# Altium PCB PCB.PcbDoc (part 2 of 2)
Units mil, origin at the board's own origin, x right, y up, seen from the top; angles counter-clockwise.
Board outline 3500 x 2500 mil, 4 copper layers (Layer 1, Layer 2, Layer 3, Layer 4), stack 23.756 mil thick; 83 components, 64 nets, 341 pads, 402 vias.
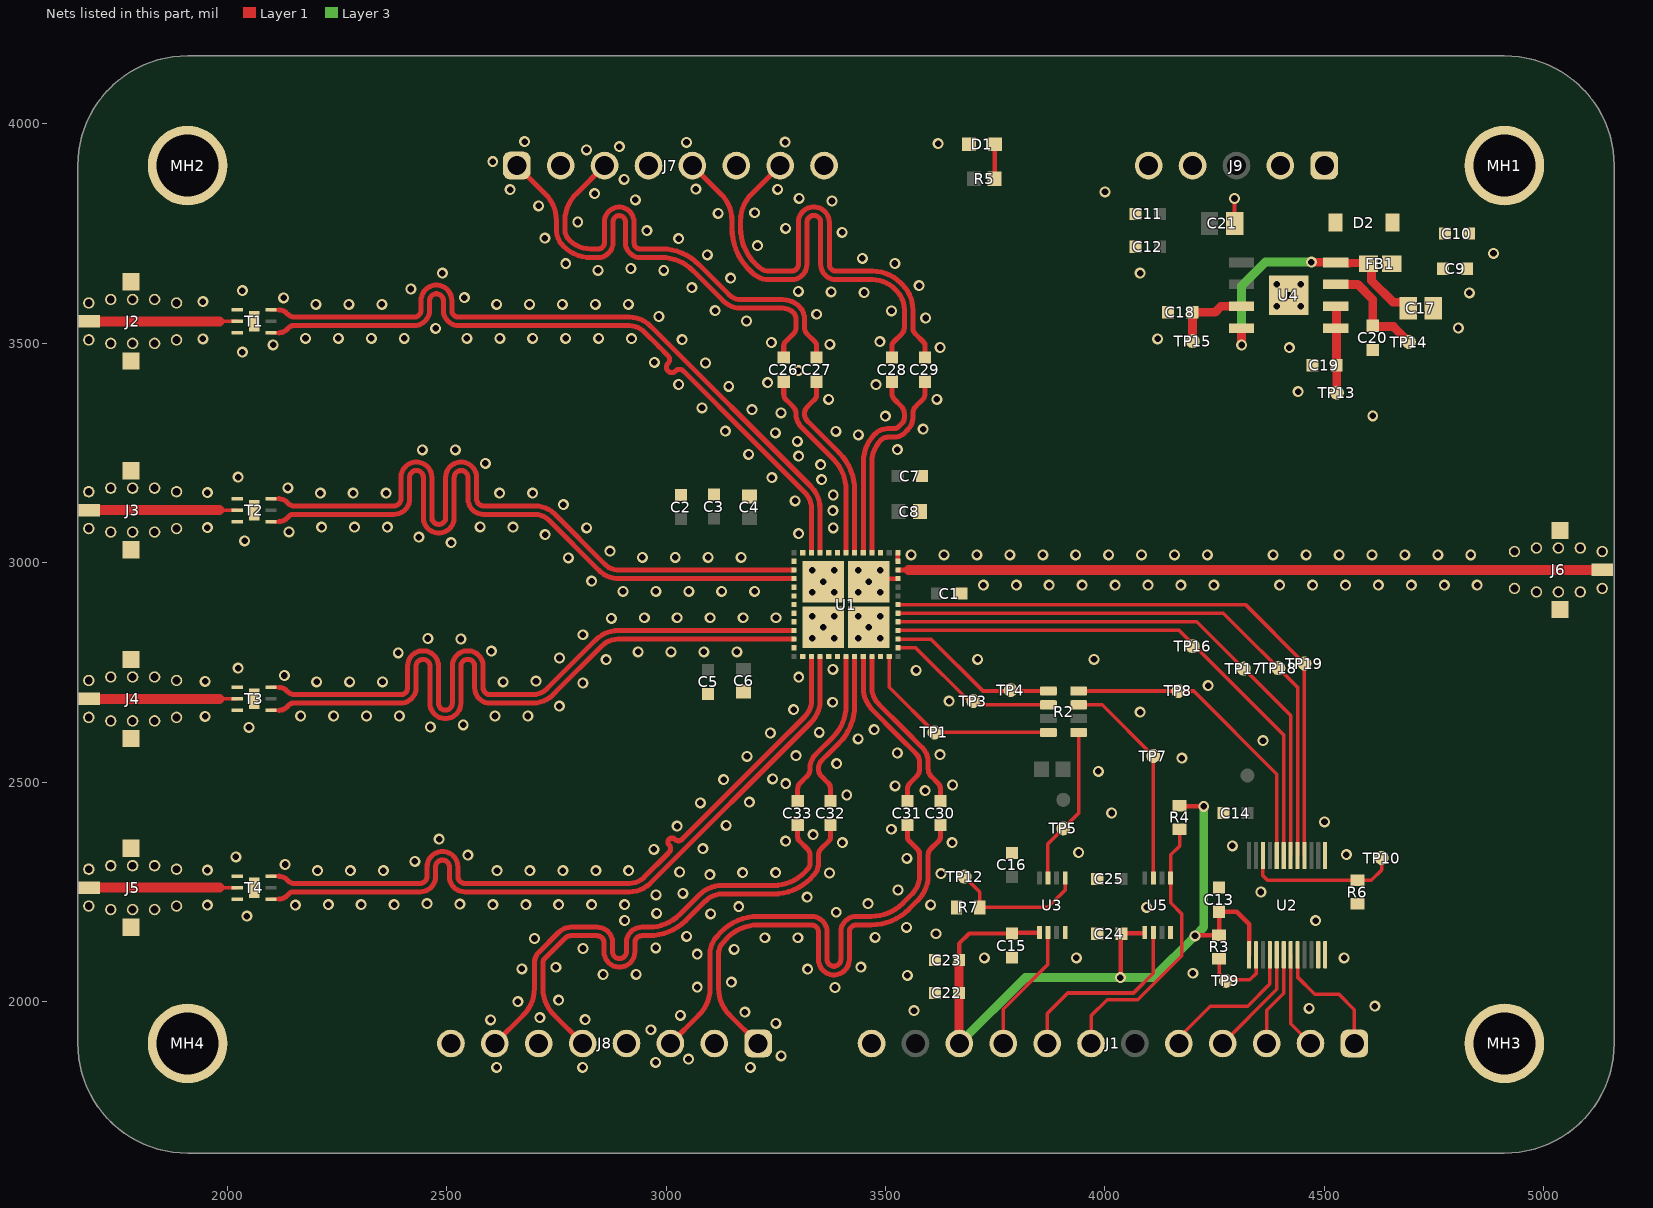
[diagram p4: the nets of this part, all layers, seen from the top]

## Via types
v1: diameter 25, hole 15, Layer 1 to Layer 4, tented both sides, 402 vias

## Nets (pads, with @x,y where several pads share a name; then routed paths per layer and width w, separated by ;. In a path a pad name is that pad's centre, name@x,y a point inside that pad or via, vN(x,y) a via of type N, cw(c..) or ccw(c..) an arc to the next point about the centre after c; other vN are vias at no path point) (continued)
GND: C1.1 C2.1 C3.2 C4.2 C5.2 C6.2 C7.2 C8.2 C9.1 C10.2 C11.1 C12.2 C13.2 C14.2 C15.2 C16.2 C17.2 C18.2 C19.2 C20.2 C21.2 C22.1 C23.2 C24.2 C25.2 D1.1 J1.12 J2.2 J3.2 J4.2 J5.2 J6.2 J7.2 J7.4 J7.6 J7.8 J8.2 J8.4 J8.6 J8.8 J9.4 J9.5 MH1.1 MH2.1 MH3.1 MH4.1 R6.1 R7.1 T1.1 T1.3 T1.7 T2.1 T2.3 T2.7 T3.1 T3.3 T3.7 T4.1 T4.3 T4.7 U1.2 U1.5 U1.6 U1.7 U1.8 U1.9 U1.12 U1.14 U1.17 U1.18 U1.23 U1.34 U1.36 U1.37 U1.39 U1.44 U1.45 U1.48 U1.49 U1.50 U1.51 U1.52 U2.11 U2.12 U2.13 U3.4 U4.EP U5.4 | length 145.5
  Layer 1 w10: v1(3462.17,2957.17) 3469.06,2964.06 U1.34@3528.11,2964.06 ; U1.36@3528.11,3003.43 U1.37@3528.11,3023.11 ; v1(4295,3830) 4295,3773.38 C21.2@4295.3,3773.08
  other v1: 2613.92,1850.61 2809.99,1850.68 3191.97,1850.7 2976.5,1862.09 3051.16,1869.22 3262.3,1876.74 2965.37,1936.26 3250.25,1950.77 2600.43,1958.65 2815.71,1959.15 2712.47,1963.65 3032.82,1969.04 3179.78,1976.43 3565,1980 4465,1985 4615,1990 2662.66,2000.51 2755.53,2003.91 3384.99,2032.6 3071.13,2033.52 3148.87,2044.77 3550,2060 2856.71,2062.12 2931.71,2062.54 4200,2065 3322.62,2074.25 2671.4,2075 2749.14,2078.64 3443.92,2078.99 3725,2100 3935,2100 4545,2100 3071.13,2108.52 3155.09,2119.51 2810.76,2121.4 2976.58,2122.63 2700.42,2144.16 3225.31,2145.86 3300.31,2145.86 3476.41,2146.58 3046.85,2148.84 3615,2155 3547.75,2169.72 2905.53,2185.13 4480,2185 2045,2195 3101.46,2200.25 2978.75,2201.35 3387.76,2203.95 4095,2215 3165.7,2216.77 1955,2220 2155.6,2220.1 2230.59,2221.13 2305.59,2221.13 2380.59,2221.13 2605.53,2221.13 2680.53,2221.13 2755.53,2221.13 2830.53,2221.13 2905.53,2221.13 3602.73,2220.74 2530.55,2222.51 2455.55,2223.55 3460.14,2223.6 3321.52,2238.4 2977.16,2243.35 3038.26,2247 4355,2250 3528.42,2254.63 3099.83,2289.83 3626.35,2291.92 3372.48,2293.43 3174.71,2294.14 3249.71,2294.3 3030.84,2295.73 2206,2298.87 2281,2298.87 2356,2298.87 2614.97,2298.87 2689.97,2298.87 2764.97,2298.87 2839.97,2298.87 2914.97,2298.87 1955,2300 2132.28,2312.66 2427.99,2319.9 3548.61,2326.87 2020,2330 2548.73,2334.05 4550,2335 3940,2340 2972.34,2347.18 3083.88,2348.77 4290,2355 3401.64,2362.53 3651.64,2362.53 3272.38,2365.8 2483.25,2370.62 3335.18,2380.89 3513.28,2393.03 3025.37,2400.21 3136.91,2401.8 4500,2410 4015,2430 3078.4,2453.25 3189.94,2454.83 3411.68,2470.98 3590.47,2480.85 3521.8,2492 3652.8,2493.81 3272.75,2496.79 3131.44,2506.28 3242.97,2507.87 3985,2525 3388.53,2542.32 4175,2555 3184.47,2559.31 3296.01,2560.9 3624.22,2563.15 3526.96,2566.82 4360,2595 3437.78,2598.88 3237.5,2612.35 3349.04,2613.93 3473.93,2619.86 2050,2625 2463.24,2625.89 2538.07,2630.89 1950,2650 2167.61,2651.13 2242.61,2651.13 2317.61,2651.13 2392.61,2651.13 2610.29,2651.13 2685.29,2651.13 4080,2660 3290.54,2665.38 2756.82,2673.7 3379.7,2682.38 3645,2685 4235,2720 2810.4,2726.18 2204.08,2728.87 2279.08,2728.87 2354.08,2728.87 2628.79,2728.87 1950,2730 2703.77,2730.61 3302.34,2739.44 2130.47,2743.25 3570,2755 3380.09,2757.38 2025,2760 2863.43,2779.21 3710,2780 3975,2780 2757.35,2783.08 2389.96,2794.73 2936.26,2797.12 3011.26,2797.12 3086.26,2797.12 3161.26,2797.12 2602.23,2799.01 2532.42,2826.43 2457.43,2827.5 3333.5,2828.5 3383.5,2828.5 3437.83,2828.5 3487.83,2828.5 2810.38,2836.12 3357.83,2852.83 3462.17,2852.83 2875.48,2873.36 2950.47,2874.86 3025.47,2874.86 3100.47,2874.86 3175.47,2874.86 3250.47,2874.86 3333.5,2878.5 3383.5,2878.5 3437.83,2878.5 3487.83,2878.5 3333.5,2932.83 3383.5,2932.83 3437.83,2932.83 3487.83,2932.83 2901.9,2934.91 2976.9,2934.91 3051.9,2934.91 3126.9,2934.91 3201.9,2934.91 3722.94,2949.31 3797.94,2949.31 3872.94,2949.31 3947.94,2949.31 4022.94,2949.31 4097.94,2949.31 4172.94,2949.31 4247.94,2949.31 4397.94,2949.31 4472.94,2949.31 4547.94,2949.31 4622.94,2949.31 4697.94,2949.31 4772.94,2949.31 4847.94,2949.31 3357.83,2957.17 2830.7,2958.46 3333.5,2982.83 3383.5,2982.83 3437.83,2982.83 3487.83,2982.83 2777.48,3011.31 2946.02,3012.66 3021.02,3012.66 3096.02,3012.66 3171.02,3012.66 3558.27,3018.17 3633.27,3018.17 3708.27,3018.17 3783.27,3018.17 3858.27,3018.17 3933.27,3018.17 4008.27,3018.17 4083.27,3018.17 4158.27,3018.17 4233.27,3018.17 4383.27,3018.17 4458.27,3018.17 4533.27,3018.17 4608.27,3018.17 4683.27,3018.17 4758.27,3018.17 4833.27,3018.17 2872.3,3026.44 2510.68,3045.86 2040,3050 2436.75,3058.47 2724.45,3064.34 3302.23,3066.5 2141.03,3070.37 2819.27,3079.47 1955,3080 3380.97,3079.5 2215.25,3081.13 2290.25,3081.13 2365.25,3081.13 2651.35,3081.13 2576.35,3082.07 3379.98,3119.08 2766.1,3132.37 3294.1,3141.06 3380.97,3154.5 2212.42,3158.87 2287.42,3158.87 2362.42,3158.87 2620.94,3158.87 2695.94,3158.87 1955,3160 2138.36,3170.73 3354.62,3189.66 3241.06,3194.09 2025,3195 3352.41,3223.85 2588.47,3226.48 3302,3243.11 3188.03,3247.13 2445.06,3257.15 2520.06,3257.21 3526.82,3257.97 3299.38,3276.89 3438.15,3291.66 3248.97,3296.14 3386.84,3299.38 3135,3300.16 3585.7,3304.43 3499.86,3334.28 4610,3335 3261.88,3341.84 3195.93,3349.17 3081.96,3353.19 3370.44,3372.56 3617.08,3372.55 4440,3390 3142.9,3402.21 3028.93,3406.23 3478.28,3406.11 3231.5,3410.41 3301.32,3437.81 3089.87,3455.24 2973.51,3456.76 2035,3480 4420,3490 3624.62,3490.58 2105.05,3496.73 3373.2,3497.53 3240.16,3501.98 3487.32,3503.89 3036.84,3508.27 1945,3510 4120,3510 2178.65,3511.13 2253.65,3511.13 2328.65,3511.13 2403.65,3511.13 2546.31,3511.13 2621.31,3511.13 2696.31,3511.13 2771.31,3511.13 2846.31,3511.13 2921.3,3510.61 2474.98,3534.31 4805,3535 3183.27,3550.86 3591.35,3557.8 2983.71,3561.21 3343.28,3566.3 3112.02,3574.29 3513.61,3574.13 4391.19,3584.33 4446.19,3584.33 2202.48,3588.87 2277.48,3588.87 2352.48,3588.87 2614,3588.87 2689,3588.87 2764,3588.87 2839,3588.87 2914,3588.87 1945,3595 2128.96,3603.7 2540.52,3603.92 4418.47,3609.33 4830,3615 3451.28,3615.86 3376.3,3617.27 3301.3,3618.21 2035,3620 2418.83,3623.83 3058.74,3627.07 3576.49,3631.31 4391.19,3634.33 4446.19,3634.33 3147.27,3648.48 2490.66,3659.94 4080,3660 2845.02,3666.4 2994.78,3666.25 2919.91,3670.57 2771.58,3681.59 3521.15,3681.93 3447.06,3693.6 3094.08,3701.36 4885,3705 3208.38,3722.79 3028.95,3738.54 2723.99,3739.56 3401.03,3752.82 2956.15,3756.59 3272.37,3761.9 2798.87,3776.5 3118.7,3796.02 3201.75,3797.49 2709.89,3813.22 3378.18,3824.25 2930.2,3826.96 3303.41,3830.18 2837.19,3840.97 4000,3845 2644.67,3850.25 3067.82,3851.12 3254.49,3850.82 2904.64,3873.76 2605.25,3914.06 2818.83,3940.76 2893.48,3947.92 3620,3955 3046.6,3957.69 3271.22,3958.43 2677.96,3959.3
GPIO_DIR: J1.7 R4.1 U5.5 | length 634
  Layer 1 w8: J1.7@3968.23,1905 3968.23,1968.23 4005,2005 4075,2005 4175,2105 4175,2200 4149.53,2225.47 U5.5@4149.53,2281.89 4149.53,2334.53 4170,2355 R4.1@4170,2393.36
IFOUT1_CAP_N: C27.2 J7.3 | length 1060
  Layer 1 w11.46: J7.3@2860,3905 2794.29,3839.29 ccw(c2853.58,3780) 2769.73,3780 2769.73,3759.79 ccw(c2804.79,3759.79) 2780,3735 ccw(c2828.28,3783.28) 2828.28,3715 2829.94,3715 2845.4,3715 ccw(c2845.4,3729.23) 2859.63,3729.23 2859.63,3776.65 cw(c2893.32,3776.65) 2927.01,3776.65 2927.01,3729.23 ccw(c2941.24,3729.23) 2941.24,3715 2981.1,3715 2990.06,3715 cw(c2990.06,3595.54) 3074.53,3680.01 3144,3610.54 ccw(c3170.75,3637.29) 3170.75,3599.46 3265.86,3599.46 cw(c3265.86,3545.86) 3303.76,3583.76 cw(c3275.59,3555.59) 3315.43,3555.59 3315.43,3535 ccw(c3333.72,3535) 3320.79,3522.07 3339.88,3502.98 cw(c3331.9,3495) 3343.18,3495 C27.2@3343.18,3467.56
IFOUT1_CAP_P: C26.2 J7.1 | length 1060
  Layer 1 w11.46: J7.1@2660,3905 2725.71,3839.29 cw(c2666.42,3780) 2750.27,3780 2750.27,3759.79 ccw(c2804.79,3759.79) 2766.24,3721.24 ccw(c2828.28,3783.28) 2828.28,3695.54 2829.94,3695.54 2845.4,3695.54 ccw(c2845.4,3729.23) 2879.09,3729.23 2879.09,3776.65 cw(c2893.32,3776.65) 2907.55,3776.65 2907.55,3729.23 ccw(c2941.24,3729.23) 2941.24,3695.54 2981.1,3695.54 2990.06,3695.54 cw(c2990.06,3595.54) 3060.77,3666.25 3130.24,3596.78 ccw(c3170.75,3637.29) 3170.75,3580 3265.86,3580 cw(c3265.86,3545.86) 3290,3570 cw(c3275.59,3555.59) 3295.97,3555.59 3295.97,3535 cw(c3277.68,3535) 3290.61,3522.07 3271.53,3502.98 ccw(c3279.5,3495) 3268.22,3495 C26.2@3268.22,3467.56
IFOUT1_N: C27.1 U1.42 | length 440.2
  Layer 1 w11.46: C27.1@3343.18,3412.44 3343.18,3384.3 cw(c3324.89,3384.3) 3337.82,3371.36 3321.77,3355.31 ccw(c3337.09,3340) 3315.43,3340 ccw(c3340.61,3340) 3322.81,3322.19 3394.58,3250.42 cw(c3310.11,3165.95) 3429.57,3165.95 3429.57,3023.22 U1.42@3429.68,3023.11
IFOUT1_P: C26.1 U1.43 | length 440.2
  Layer 1 w11.46: C26.1@3268.22,3412.44 3268.22,3384.3 ccw(c3286.51,3384.3) 3273.58,3371.36 3289.63,3355.31 cw(c3274.32,3340) 3295.97,3340 ccw(c3340.61,3340) 3309.05,3308.43 3380.82,3236.66 cw(c3310.11,3165.95) 3410.11,3165.95 3410.11,3023.22 U1.43@3410,3023.11
IFOUT2_CAP_N: C29.2 J7.7 | length 1047.6
  Layer 1 w11.46: J7.7@3260,3905 3194.29,3839.29 ccw(c3253.58,3780) 3169.73,3780 3169.73,3762.27 ccw(c3284.61,3762.42) 3208.83,3676.08 cw(c3188.42,3652.85) 3210.13,3674.87 ccw(c3235.45,3700.45) 3210.33,3674.68 ccw(c3235.45,3700.45) 3235.45,3664.46 3270.32,3664.46 3285.78,3664.46 ccw(c3285.78,3680.19) 3301.51,3680.19 3301.51,3775.58 cw(c3336.7,3775.58) 3371.89,3775.58 3371.89,3680.19 ccw(c3387.62,3680.19) 3387.62,3664.46 3469.44,3664.46 3470,3664.46 cw(c3470,3572.57) 3534.97,3637.55 3538.76,3633.76 cw(c3482.15,3577.15) 3562.21,3577.15 3562.21,3535 ccw(c3580.5,3535) 3567.57,3522.07 3586.66,3502.98 cw(c3578.68,3495) 3589.96,3495 C29.2@3589.96,3467.56
IFOUT2_CAP_P: C28.2 J7.5 | length 1047.6
  Layer 1 w11.46: J7.5@3060,3905 3125.71,3839.29 cw(c3066.42,3780) 3150.27,3780 3150.27,3762.26 ccw(c3284.61,3762.42) 3195.99,3661.46 cw(c3188.42,3652.85) 3196.46,3661.02 ccw(c3235.45,3700.45) 3196.68,3660.81 ccw(c3210.33,3674.68) 3196.75,3660.74 ccw(c3235.45,3700.45) 3235.45,3645 3270.32,3645 3285.78,3645 ccw(c3285.78,3680.19) 3320.97,3680.19 3320.97,3775.58 cw(c3336.7,3775.58) 3352.43,3775.58 3352.43,3680.19 ccw(c3387.62,3680.19) 3387.62,3645 3469.44,3645 3470,3645 cw(c3470,3572.57) 3521.21,3623.79 3525,3620 cw(c3482.15,3577.15) 3542.75,3577.15 3542.75,3535 cw(c3524.46,3535) 3537.39,3522.07 3518.3,3502.98 ccw(c3526.28,3495) 3515,3495 C28.2@3515,3467.56
IFOUT2_N: C29.1 U1.40 | length 452.6
  Layer 1 w11.46: U1.40@3469.06,3023.11 3468.94,3023.22 3468.94,3229.16 cw(c3540.84,3229.16) 3490,3280 cw(c3505.06,3264.94) 3505.06,3286.24 3519.62,3286.24 ccw(c3519.62,3320.38) 3543.76,3296.24 3551.38,3303.86 ccw(c3525.25,3330) 3562.21,3330 3562.21,3340 cw(c3585.56,3340) 3569.05,3356.51 3584.6,3372.07 ccw(c3571.67,3385) 3589.96,3385 C29.1@3589.96,3412.44
IFOUT2_P: C28.1 U1.41 | length 452.6
  Layer 1 w11.46: U1.41@3449.37,3023.11 3449.48,3023.22 3449.48,3229.16 cw(c3540.84,3229.16) 3476.24,3293.76 cw(c3505.06,3264.94) 3505.06,3305.7 3519.62,3305.7 ccw(c3519.62,3320.38) 3530,3310 3537.62,3317.62 ccw(c3525.25,3330) 3542.75,3330 3542.75,3340 ccw(c3519.4,3340) 3535.92,3356.51 3520.36,3372.07 cw(c3533.29,3385) 3515,3385 C28.1@3515,3412.44
IFOUT3_CAP_N: C30.2 J8.1 | length 1112.3
  Layer 1 w11.46: 3129.41,2134.4 ccw(c3154.79,2110.21) 3119.73,2110.21 3119.73,2030 ccw(c3203.58,2030) 3144.29,1970.71 J8.1@3210,1905 ; 3129.43,2134.42 cw(c3154.79,2110.21) 3129.77,2134.76 ccw(c3107.62,2156.34) 3131.92,2137.22 cw(c3209.47,2076.51) 3209.47,2175 3217.35,2175 3331.57,2175 cw(c3331.57,2159.27) 3347.3,2159.27 3347.3,2096.58 ccw(c3382.49,2096.58) 3417.68,2096.58 3417.68,2159.27 cw(c3433.41,2159.27) 3433.41,2175 3448.87,2175 3467.37,2175 ; 3467.39,2175 ccw(c3467.27,2296.3) 3553.05,2210.53 3573.76,2231.24 ccw(c3517.15,2287.85) 3597.21,2287.85 3597.21,2335 cw(c3615.5,2335) 3602.57,2347.93 3621.66,2367.02 ccw(c3613.68,2375) 3624.96,2375 C30.2@3624.96,2402.44
IFOUT3_CAP_P: C31.2 J8.3 | length 1112.3
  Layer 1 w11.46: J8.3@3010,1905 3075.71,1970.71 ccw(c3016.42,2030) 3100.27,2030 3100.27,2110.21 cw(c3154.79,2110.21) 3115.32,2147.82 ; 3115.36,2147.86 cw(c3154.79,2110.21) 3115.84,2148.36 ccw(c3107.62,2156.34) 3116.61,2149.23 cw(c3209.47,2076.51) 3209.47,2194.46 3217.35,2194.46 3217.53,2194.46 3331.57,2194.46 cw(c3331.57,2159.27) 3366.76,2159.27 3366.76,2096.58 ccw(c3382.49,2096.58) 3398.22,2096.58 3398.22,2159.27 cw(c3433.41,2159.27) 3433.41,2194.46 3448.87,2194.46 3467.37,2194.46 ccw(c3467.27,2296.3) 3539.29,2224.29 3560,2245 ccw(c3517.15,2287.85) 3577.75,2287.85 3577.75,2335 ccw(c3559.46,2335) 3572.39,2347.93 3553.3,2367.02 cw(c3561.28,2375) 3550,2375 C31.2@3550,2402.44
IFOUT3_N: C30.1 U1.22 | length 387.9
  Layer 1 w11.46: U1.22@3469.06,2786.89 3468.94,2786.78 3468.94,2716 ccw(c3523.08,2716) 3484.8,2677.72 3541.26,2621.26 3583.76,2578.76 cw(c3551.29,2546.29) 3597.21,2546.29 3597.21,2530 ccw(c3620.56,2530) 3604.04,2513.49 3619.6,2497.93 cw(c3606.67,2485) 3624.96,2485 C30.1@3624.96,2457.56
IFOUT3_P: C31.1 U1.21 | length 387.9
  Layer 1 w11.46: U1.21@3449.37,2786.89 3449.48,2786.78 3449.48,2716 ccw(c3523.08,2716) 3471.04,2663.96 3527.5,2607.5 3570,2565 cw(c3551.29,2546.29) 3577.75,2546.29 3577.75,2530 cw(c3554.4,2530) 3570.92,2513.49 3555.36,2497.93 ccw(c3568.29,2485) 3550,2485 C31.1@3550,2457.56
IFOUT4_CAP_N: C32.2 J8.5 | length 1133.4
  Layer 1 w11.46: J8.5@2810,1905 2744.29,1970.71 cw(c2803.58,2030) 2719.73,2030 2720,2030.27 2720,2090 cw(c2732.07,2090) 2723.54,2098.54 2770,2145 cw(c2783.37,2131.63) 2783.37,2150.54 2784.9,2150.54 2843.01,2150.54 cw(c2843.01,2134.81) 2858.74,2134.81 2858.74,2114.05 ccw(c2893.93,2114.05) 2929.12,2114.05 2929.12,2134.81 cw(c2944.85,2134.81) 2944.85,2150.54 2960.31,2150.54 2961.06,2150.54 ccw(c2961.06,2270) 3045.53,2185.53 3090,2230 cw(c3127.52,2192.48) 3127.52,2245.54 3150.63,2245.54 3160,2245.54 3244.92,2245.54 ; 3244.93,2245.54 ccw(c3244.92,2363.91) 3336.5,2288.91 cw(c3345.34,2281.62) 3337.1,2289.58 ccw(c3311.66,2314.41) 3347.21,2314.41 3347.21,2335 cw(c3365.5,2335) 3352.57,2347.93 3371.66,2367.02 ccw(c3363.68,2375) 3374.96,2375 C32.2@3374.96,2402.44
IFOUT4_CAP_P: C33.2 J8.7 | length 1133.4
  Layer 1 w11.46: J8.7@2610,1905 2675.71,1970.71 ccw(c2616.42,2030) 2700.27,2030 2700.27,2038.06 2700.54,2038.33 2700.54,2090 cw(c2732.07,2090) 2709.78,2112.3 2756.24,2158.76 cw(c2783.37,2131.63) 2783.37,2170 2784.9,2170 2843.01,2170 cw(c2843.01,2134.81) 2878.2,2134.81 2878.2,2114.05 ccw(c2893.93,2114.05) 2909.66,2114.05 2909.66,2134.81 cw(c2944.85,2134.81) 2944.85,2170 2960.31,2170 2961.06,2170 ccw(c2961.06,2270) 3031.77,2199.29 3076.24,2243.76 cw(c3127.52,2192.48) 3127.52,2265 3150.63,2265 3160,2265 3244.83,2265 cw(c3244.91,2234.08) 3244.95,2265 ; 3244.98,2265 ccw(c3244.92,2363.91) 3321.45,2301.25 cw(c3345.34,2281.62) 3323.17,2303.17 ccw(c3311.66,2314.41) 3327.75,2314.41 3327.75,2335 ccw(c3309.46,2335) 3322.39,2347.93 3303.3,2367.02 cw(c3311.28,2375) 3300,2375 C33.2@3300,2402.44
IFOUT4_N: C32.1 U1.20 | length 366.9
  Layer 1 w11.46: C32.1@3374.96,2457.56 3374.96,2485 ccw(c3356.67,2485) 3369.6,2497.93 3354.05,2513.49 cw(c3370.56,2530) 3347.21,2530 3347.21,2531.19 cw(c3373.81,2531.19) 3355,2550 3372.5,2567.5 3394.58,2589.58 ccw(c3310.11,2674.05) 3429.57,2674.05 3429.57,2676 3429.57,2698.06 3429.57,2786.78 U1.20@3429.68,2786.89
IFOUT4_P: C33.1 U1.19 | length 366.9
  Layer 1 w11.46: C33.1@3300,2457.56 3300,2485 cw(c3318.29,2485) 3305.36,2497.93 3320.91,2513.49 ccw(c3304.4,2530) 3327.75,2530 3327.75,2531.19 cw(c3373.81,2531.19) 3341.24,2563.76 3380.82,2603.34 ccw(c3310.11,2674.05) 3410.11,2674.05 3410.11,2676 3410.11,2690 3410.11,2786.78 U1.19@3410,2786.89
LOIN: J6.1 U1.35 | length 1609.7
  Layer 1 w11.81: U1.35@3528.11,2983.74 3552.8,2983.74
  Layer 1 w22.54: 3552.8,2983.74 J6.1@5137.8,2983.74
MADV: TP19.1 U1.31 U2.16 | length 1419.6
  Layer 1 w8: U1.31@3528.11,2905 4320,2905 TP19.1@4454.37,2770.63 U2.16@4454.37,2332.99
MADV_MCU: J1.1 U2.8 | length 262
  Layer 1 w8: U2.8@4438.65,2081.1 4438.65,2056.35 4478.23,2016.77 4533.23,2016.77 4568.23,1981.77 J1.1@4568.23,1905
MISO: R2.1 TP5.1 U3.7 | length 360.5
  Layer 1 w8: U3.7@3870.16,2281.89 3870.16,2360.16 3940,2430 R2.1@3940,2613.5
MISO_ADAR: R2.8 TP1.1 U1.24 | length 475.7
  Layer 1 w8: U1.24@3508.43,2786.89 3508.43,2716.57 TP1.1@3611.5,2613.5 R2.8@3871.1,2613.5
MISO_MCU: J1.9 U3.2 | length 295.3
  Layer 1 w8: J1.9@3768.23,1905 3768.23,1983.23 3870.16,2085.16 U3.2@3870.16,2158.11
MOSI: R2.3 TP7.1 U5.7 | length 496.4
  Layer 1 w8: R2.3@3940,2676.5 3993.5,2676.5 TP7.1@4110.16,2559.84 U5.7@4110.16,2281.89
MOSI_ADAR: R2.6 TP3.1 U1.26 | length 396.9
  Layer 1 w8: U1.26@3528.11,2806.57 3568.43,2806.57 3698.5,2676.5 R2.6@3871.1,2676.5
MOSI_MCU: J1.8 U5.2 | length 441.2
  Layer 1 w8: J1.8@3868.23,1905 3868.23,1973.23 3915,2020 4065,2020 4110.16,2065.16 U5.2@4110.16,2158.11
MRST: TP18.1 U1.30 U2.17 | length 1363.9
  Layer 1 w8: U1.30@3528.11,2885.32 4269.69,2885.32 4438.62,2716.38 U2.17@4438.62,2332.99
MRST_MCU: J1.2 U2.7 | length 220.8
  Layer 1 w8: U2.7@4422.87,2107.01 4422.87,1950.35 J1.2@4468.23,1905
NetC9_2: C9.2 C10.1 D2.1 FB1.2
NetC18_1: C18.1 TP15.1 U4.3 | length 184.3
  Layer 1 w10: C18.1@4198.81,3570.86 C18.1@4199.41,3570.27 ; TP15.1@4199.41,3505.59 TP15.1@4200,3505
  Layer 1 w20: C18.1@4198.81,3570.86 4250.86,3570.86 4264.33,3584.33 U4.3@4311.19,3584.33 ; TP15.1@4199.41,3505.59 C18.1@4199.41,3570.27
NetC19_1: C19.1 TP13.1 U4.5 U4.6 | length 197.9
  Layer 1 w10: U4.6@4525.74,3584.33 U4.6@4527.56,3582.52 ; C19.1@4527.56,3450 C19.1@4527.97,3449.59 ; TP13.1@4527.97,3387.93 TP13.1@4528.38,3387.52
  Layer 1 w20: C19.1@4527.56,3450 U4.6@4527.56,3582.52 ; TP13.1@4527.97,3387.93 C19.1@4527.97,3449.59
NetC20_1: C20.1 TP14.1 U4.7 | length 256.1
  Layer 1 w20: U4.7@4525.74,3634.33 4575.67,3634.33 4610,3600 C20.1@4610,3540.12 4612.02,3538.1 4657.29,3538.1 TP14.1@4692.36,3503.03
NetD1_2: D1.2 R5.2 | length 78.6
  Layer 1 w10: R5.2@3748.66,3875 3749.29,3875.63 D1.2@3749.29,3953.39
NetR3_1: R3.1 TP9.1 U2.2 | length 146.5
  Layer 1 w8: R3.1@4260,2098.36 4260,2065 4275,2050 4330,2050 4344.07,2064.07 4344.07,2081.06 U2.2@4344.11,2081.1
NetR6_2: R6.2 TP10.1 U2.22 | length 357.6
  Layer 1 w8: U2.22@4359.88,2332.99 4359.88,2287.09 4370.33,2276.64 R6.2@4575,2276.64 4606.64,2276.64 4630.26,2300.26 TP10.1@4630.26,2327.48
NetR7_2: R7.2 TP12.1 U3.5 | length 322.8
  Layer 1 w8: TP12.1@3680,2285 3715,2250 R7.2@3715,2215 3870,2215 3909.53,2254.53 U3.5@3909.53,2281.89
RFIN1: J2.1 T1.2 | length 338
  Layer 1 w8: 1983,3550 T1.2@2023,3550
  Layer 1 w22.54: J2.1@1685,3550 1983,3550
RFIN1_N: T1.6 U1.46 | length 1648.1
  Layer 1 w8: T1.6@2100,3576 2118,3576
  Layer 1 w11.46: 2118,3576 cw(c2118,3550.1) 2136.32,3568.41 ; 2137.71,3567.02 2139.46,3565.27 ccw(c2152.89,3578.79) 2152.89,3559.73 2410.6,3559.73 2426.06,3559.73 ccw(c2426.06,3575.46) 2441.79,3575.46 2441.79,3597.33 cw(c2476.98,3597.33) 2512.17,3597.33 2512.17,3575.46 ccw(c2527.9,3575.46) 2527.9,3559.73 2897.4,3559.73 2916.51,3559.73 cw(c2916.51,3540.27) 2916.6,3559.73 cw(c2916.64,3528.81) 2916.7,3559.73 cw(c2916.51,3492.97) 2959.47,3544.07 cw(c2939.64,3520.35) 2959.52,3544.03 cw(c2916.51,3492.97) 2963.68,3540.22 2963.79,3540.1 3330.08,3173.81 3330.21,3173.69 cw(c3280.31,3123.85) 3350.83,3124.02 3350.83,3123.89 ; 3350.83,3123.85 3350.83,3023.22 U1.46@3350.94,3023.11
RFIN1_P: T1.4 U1.47 | length 1648.1
  Layer 1 w8: T1.4@2100,3524 2118,3524
  Layer 1 w11.46: 2118,3524 ccw(c2118,3549.9) 2136.32,3531.59 2141.12,3536.39 cw(c2150.48,3527.04) 2150.48,3540.27 2410.6,3540.27 2426.06,3540.27 ccw(c2426.06,3575.46) 2461.25,3575.46 2461.25,3597.33 cw(c2476.98,3597.33) 2492.71,3597.33 2492.71,3575.46 ccw(c2527.9,3575.46) 2527.9,3540.27 2897.4,3540.27 2916.51,3540.27 ccw(c2916.52,3550) 2916.57,3540.27 cw(c2916.64,3528.81) 2916.65,3540.27 cw(c2916.51,3492.97) 2946.96,3529.16 ; 2946.99,3529.14 cw(c2916.51,3492.97) 2949.93,3526.44 2949.98,3526.39 ccw(c2963.8,3540.1) 2950.04,3526.34 2983.19,3493.19 3004.53,3471.84 cw(c2995.89,3463.19) 3004.53,3454.54 3004.37,3454.38 ccw(c3013.02,3445.73) 3004.37,3437.08 ccw(c3013.02,3445.73) 3021.66,3437.08 3021.83,3437.25 cw(c3030.48,3428.6) 3039.13,3437.25 3198.87,3277.51 3316.32,3160.05 ccw(c3330.08,3173.81) 3316.37,3160 3316.44,3159.93 cw(c3280.31,3123.85) 3331.37,3124 3331.37,3123.85 3331.37,3023.22 U1.47@3331.26,3023.11
RFIN2: J3.1 T2.2 | length 338
  Layer 1 w8: 1983,3120 T2.2@2023,3120
  Layer 1 w22.54: J3.1@1685,3120 1983,3120
RFIN2_N: T2.6 U1.3 | length 1647.8
  Layer 1 w8: T2.6@2100,3146 2118,3146
  Layer 1 w11.46: 2118,3146 cw(c2118,3120.1) 2136.32,3138.41 ; 2137.71,3137.02 2139.46,3135.27 ccw(c2152.89,3148.79) 2152.89,3129.73 2365,3129.73 2380.46,3129.73 ccw(c2380.46,3145.46) 2396.19,3145.46 2396.19,3194.54 cw(c2431.38,3194.54) 2466.57,3194.54 2466.57,3103.22 ccw(c2482.3,3103.22) 2498.03,3103.22 2498.03,3194.53 cw(c2533.22,3194.53) 2568.41,3194.53 2568.41,3145.46 ccw(c2584.14,3145.46) 2584.14,3129.73 2692.71,3129.73 2701.51,3129.73 cw(c2701.51,3066.28) 2746.3,3111.22 2861.64,2995.88 ; 2861.66,2995.86 ccw(c2891.42,3025.57) 2864.13,2993.58 ccw(c2891.42,3025.57) 2888.08,2983.65 ccw(c2891.42,3025.57) 2891.5,2983.52 U1.3@3291.89,2983.52
RFIN2_P: T2.4 U1.4 | length 1650
  Layer 1 w8: T2.4@2100,3094 2118,3094
  Layer 1 w11.46: 2118,3094 ccw(c2118,3119.9) 2136.32,3101.59 2141.12,3106.39 cw(c2150.48,3097.04) 2150.48,3110.27 2365,3110.27 2380.46,3110.27 ccw(c2380.46,3145.46) 2415.65,3145.46 2415.65,3194.54 cw(c2431.38,3194.54) 2447.11,3194.54 2447.11,3103.22 ccw(c2482.3,3103.22) 2517.49,3103.22 2517.49,3194.53 cw(c2533.22,3194.53) 2548.95,3194.53 2548.95,3145.46 ccw(c2584.14,3145.46) 2584.14,3110.27 2692.71,3110.27 2701.51,3110.27 ccw(c2701.51,3129.73) 2701.56,3110.27 cw(c2701.51,3066.28) 2732.58,3097.42 2847.87,2982.13 ccw(c2891.42,3025.57) 2851.5,2978.77 ccw(c2891.42,3025.57) 2886.6,2964.24 ; 2886.63,2964.24 ccw(c2891.42,3025.57) 2891.47,2964.06 ; 2891.5,2964.06 U1.4@3291.89,2964.06
RFIN3: J4.1 T3.2 | length 338
  Layer 1 w8: 1983,2690 T3.2@2023,2690
  Layer 1 w22.54: J4.1@1685,2690 1983,2690
RFIN3_N: T3.4 U1.11 | length 1635.7
  Layer 1 w8: T3.4@2100,2664 2118,2664
  Layer 1 w11.46: 2118,2664 ccw(c2118,2689.9) 2136.32,2671.59 2141.12,2676.39 cw(c2150.48,2667.04) 2150.48,2680.27 2380,2680.27 2395.46,2680.27 ccw(c2395.46,2715.46) 2430.65,2715.46 2430.65,2764.54 cw(c2446.38,2764.54) 2462.11,2764.54 2462.11,2680.1 ccw(c2497.3,2680.1) 2532.49,2680.1 2532.49,2764.54 cw(c2548.22,2764.54) 2563.95,2764.54 2563.95,2715.46 ccw(c2599.14,2715.46) 2599.14,2680.27 2672.9,2680.27 2696.43,2680.27 ccw(c2696.51,2744.87) 2742.18,2699.18 2747.88,2704.88 2853.93,2810.93 cw(c2890.88,2774.06) 2890.82,2826.26 ccw(c2890.86,2835.99) 2890.88,2826.26 U1.11@3291.89,2826.26
RFIN3_P: T3.6 U1.10 | length 1633.3
  Layer 1 w8: T3.6@2100,2716 2118,2716
  Layer 1 w11.46: 2118,2716 cw(c2118,2690.1) 2136.32,2708.41 ; 2137.71,2707.02 2139.46,2705.27 ccw(c2152.89,2718.79) 2152.89,2699.73 2380,2699.73 2395.46,2699.73 ccw(c2395.46,2715.46) 2411.19,2715.46 2411.19,2764.54 cw(c2446.38,2764.54) 2481.57,2764.54 2481.57,2680.1 ccw(c2497.3,2680.1) 2513.03,2680.1 2513.03,2764.54 cw(c2548.22,2764.54) 2583.41,2764.54 2583.41,2715.46 ccw(c2599.14,2715.46) 2599.14,2699.73 2672.9,2699.73 2696.44,2699.73 ccw(c2696.43,2745.06) 2728.53,2713.05 2840.17,2824.69 ; 2840.2,2824.72 cw(c2890.88,2774.06) 2890.81,2845.72 cw(c2890.88,2826.26) 2890.88,2845.72 3287.96,2845.72 3288.01,2845.77 U1.10@3291.71,2845.77
RFIN4: J5.1 T4.2 | length 338
  Layer 1 w8: 1983,2260 T4.2@2023,2260
  Layer 1 w22.54: J5.1@1685,2260 1983,2260
RFIN4_N: T4.4 U1.16 | length 1650
  Layer 1 w8: T4.4@2100,2234 2118,2234
  Layer 1 w11.46: 2118,2234 ccw(c2118,2259.9) 2136.32,2241.59 2141.12,2246.39 cw(c2150.48,2237.04) 2150.48,2250.27 2424.35,2250.27 2439.81,2250.27 ccw(c2439.81,2285.46) 2475,2285.46 2475,2307.19 cw(c2490.73,2307.19) 2506.46,2307.19 2506.46,2285.46 ccw(c2541.65,2285.46) 2541.65,2250.27 2734.35,2250.27 2916.43,2250.27 2916.54,2250.27 ccw(c2916.51,2317.03) 2963.76,2269.87 3330.13,2636.24 ccw(c3280.04,2686.42) 3350.95,2686.42 U1.16@3350.94,2786.89
RFIN4_P: T4.6 U1.15 | length 1641.2
  Layer 1 w8: T4.6@2100,2286 2118,2286
  Layer 1 w11.46: 2118,2286 cw(c2118,2260.1) 2136.32,2278.41 ; 2137.71,2277.02 2139.46,2275.27 ccw(c2152.89,2288.79) 2152.89,2269.73 2424.35,2269.73 2439.81,2269.73 ccw(c2439.81,2285.46) 2455.54,2285.46 2455.54,2307.19 cw(c2490.73,2307.19) 2525.92,2307.19 2525.92,2285.46 ccw(c2541.65,2285.46) 2541.65,2269.73 2734.35,2269.73 2916.43,2269.73 cw(c2916.43,2250.27) 2916.51,2269.73 ; 2916.54,2269.73 ccw(c2916.51,2317.03) 2949.95,2283.58 cw(c2963.76,2269.87) 2950,2283.63 3003.19,2336.81 3007.24,2340.87 ccw(c2999.13,2348.97) 3007.24,2357.07 3007.1,2357.21 cw(c3013.62,2363.74) 3007.1,2370.27 cw(c3013.63,2363.74) 3020.15,2370.27 3020.29,2370.13 ccw(c3028.39,2378.23) 3036.5,2370.13 3243.61,2577.24 3316.37,2650 cw(c3330.13,2636.24) 3316.42,2650.05 ccw(c3280.04,2686.42) 3331.48,2686.37 cw(c3350.94,2686.42) 3331.48,2686.42 U1.15@3331.48,2786.89
RxADV: TP17.1 U1.29 U2.18 | length 1302.3
  Layer 1 w8: U1.29@3528.11,2865.63 4209.37,2865.63 4422.87,2652.13 U2.18@4422.87,2332.99
RxADV_MCU: J1.3 U2.6 | length 218.1
  Layer 1 w8: J1.3@4368.23,1905 4368.23,1980.77 4407.13,2019.67 U2.6@4407.13,2107.01
RxRST: TP16.1 U1.28 U2.19 | length 1252.5
  Layer 1 w8: U1.28@3528.11,2845.94 4169.06,2845.94 4407.13,2607.87 U2.19@4407.13,2332.99
RxRST_MCU: J1.4 U2.5 | length 253
  Layer 1 w8: J1.4@4268.23,1905 4391.38,2028.15 U2.5@4391.38,2107.01
SCK: R2.4 TP8.1 U2.20 | length 715.4
  Layer 1 w8: R2.4@3940,2707.99 TP8.1@4167.01,2707.99 4202.01,2707.99 4391.38,2518.62 U2.20@4391.38,2332.99
SCK_ADAR: R2.5 TP4.1 U1.27 | length 392
  Layer 1 w8: U1.27@3528.11,2826.26 3603.74,2826.26 3722.01,2707.99 R2.5@3871.1,2707.99
SCK_MCU: J1.5 U2.4 | length 337.7
  Layer 1 w8: J1.5@4168.23,1905 4168.23,1918.23 4240,1990 4325,1990 4375.63,2040.63 U2.4@4375.63,2107.01
Vin: D2.2 J9.1 J9.2
VinF: C17.1 FB1.1 U4.4 U4.8 | length 611.8
  Layer 1 w20: v1(4311.19,3496.19) U4.4@4311.19,3534.33 ; v1@4470.33,3684.67 U4.8@4525.41,3684.67 ; 4555.92,3682.5 4605,3683.56 4607.18,3681.37 4607.18,3642.82 4656.36,3593.64 4681.18,3593.64 4690.97,3583.84 C17.1@4690.97,3580.28
  Layer 3 w20: v1(4311.19,3496.19) 4311.19,3631.19 4365,3685 v1(4470,3685)
VLogic: C13.1 C15.1 C22.2 C23.1 C24.1 J1.10 R3.2 R4.2 U2.1 U3.1 U5.1 | length 1832.7
  Layer 1 w10: C23.1@3667.56,2095 3667.56,2132.56 3690.66,2155.66 C15.1@3788.02,2155.66 3789.24,2156.89 3849.97,2156.89 3850.47,2157.39 U3.1@3850.47,2158.11 ; v1(4035,2055) 4036.28,2056.28 4036.28,2153.72 4039.11,2156.56 4089.97,2156.56 4090.47,2157.06 U5.1@4090.47,2158.11 ; R4.2@4170,2446.64 4170.82,2445.82 4224.18,2445.82 v1(4225,2445) ; v1(4205,2150) 4206.64,2151.64 R3.2@4260,2151.64 C13.1@4260,2205 4300,2205 4328.39,2176.61 U2.1@4328.39,2107.01
  Layer 1 w20: J1.10@3667.56,1905.67 C22.2@3667.56,2020 C23.1@3667.56,2095
  Layer 3 w20: J1.10@3668.23,1905 3818.23,2055 v1(4035,2055) 4110,2055 v1(4205,2150) 4225,2170 v1(4225,2445)
pads on no net: T1.5 T2.5 T3.5 T4.5 U2.9 U2.10 U2.14 U2.15 U3.3 U3.6 U5.3 U5.6

## Polygon pours and split planes (outlines as drawn)
GND on Layer 1 "GND_L01_P000" (solid, remove dead copper, pour order 0): 1660,1905 1660,3905 cw(c1910,3905) 1910,4155 4910,4155 cw(c4910,3905) 5160,3905 5160,1905 cw(c4910,1905) 4910,1655 1910,1655 cw(c1910,1905)
GND on Layer 2 "GND_L02_P003" (solid, remove dead copper, pour order 3): 1660,1905 1660,3905 cw(c1910,3905) 1910,4155 4910,4155 cw(c4910,3905) 5160,3905 5160,1905 cw(c4910,1905) 4910,1655 1910,1655 cw(c1910,1905)
+2.5 on Layer 3 "+2.5_L03_P002" (solid, remove dead copper, pour order 2): 1660,1905 1660,3905 cw(c1910,3905) 1910,4155 4910,4155 cw(c4910,3905) 5160,3905 5160,1905 cw(c4910,1905) 4910,1655 1910,1655 cw(c1910,1905)
GND on Layer 4 "GND_L04_P001" (solid, remove dead copper, pour order 1): 1660,1905 1660,3905 cw(c1910,3905) 1910,4155 4910,4155 cw(c4910,3905) 5160,3905 5160,1905 cw(c4910,1905) 4910,1655 1910,1655 cw(c1910,1905)

## Other copper
Layer 1:
  rectangle net NetC19_1: 4488.97,3515.33 4562.51,3603.33
  rectangle net GND: 4905,3009.25 4958,3050
  rectangle net GND: 4900,2920 4958,2960.75
  rectangle net GND: 1862,3574.25 1920,3620
  rectangle net GND: 1862,3480 1920,3525.75
  rectangle net GND: 1862,3144.25 1930,3195
  rectangle net GND: 1862,3050 1920,3095.75
  rectangle net GND: 1862,2714.25 1925,2760
  rectangle net GND: 1862,2615 1920,2665.75
  rectangle net GND: 1862,2284.25 1925,2330
  rectangle net GND: 1862,2190 1915,2235.75
  rectangle net +2.5: 4180,3615.33 4347.97,3710
  rectangle net +2.5: 4180,3615.33 4265.5,3806.83
  rectangle net VinF: 4490,3660 4621.84,3705
  rectangle net NetC9_2: 4630,3650 4795.93,3805
  rectangle net Vin: 4355,3750 4550,3950
Layer 2:
  rectangle net GND: 3300,2785 3530,3015
  rectangle net GND: 4890,2905 5160,3090
  rectangle net GND: 1660,2170 1920,3635
Layer 4:
  rectangle net GND: 3305,2790 3520,3005
  rectangle net GND: 4890,2905 4935,3055
  rectangle net GND: 1885,2180 1920,3625

## Silkscreen, mask and mechanical layers (free items; w line width, h text height)
Top Overlay:
  text "POWER" at 3580,4005 h60
  text "GND" at 4118,3982 h35 r90
  text "GND" at 4218,3982 h35 r90
  text "+1.8V" at 4318,3982 h35 r90
  text "Vin" at 4418,3982 h35 r90
  text "Vin" at 4518,3982 h35 r90
  text "IF1P" at 2678,3977 h35 r90
  text "GND" at 2778,3977 h35 r90
  text "IF1N" at 2878,3977 h35 r90
  text "GND" at 2978,3977 h35 r90
  text "IF2P" at 3078,3977 h35 r90
  text "GND" at 3178,3977 h35 r90
  text "IF2N" at 3278,3977 h35 r90
  text "GND" at 3378,3977 h35 r90
  text "RFIN1*" at 1683,3733 h50
  text "MIMO" at 3740,3515 h100
  text "FMCW" at 3740,3375 h100
  text "RFIN2*" at 1683,3303 h50
  text "Radar" at 3735,3235 h100
  text "LOIN" at 4948,3163 h50
  text "Receiver" at 3735,3090 h100
  text "RFIN3" at 1683,2878 h50
  text "RFIN4" at 1683,2438 h50
  text "CS" at 4588,1772 h35 r90
  text "VIO" at 3688,1747 h35 r90
  text "DIR" at 3788,1747 h35 r90
  text "GND" at 2528,1737 h35 r90
  text "GND" at 2728,1737 h35 r90
  text "GND" at 2928,1737 h35 r90
  text "GND" at 3128,1737 h35 r90
  text "GND" at 3483,1737 h35 r90
  text "SCK" at 4388,1737 h35 r90
  text "MOSI" at 4483,1717 h35 r90
  text "IF3N" at 3228,1712 h35 r90
  text "MISO" at 4288,1712 h35 r90
  text "IF4P" at 2628,1707 h35 r90
  text "IF4N" at 2828,1707 h35 r90
  text "IF3P" at 3028,1707 h35 r90
  text "MADV" at 3988,1702 h35 r90
  text "MRST" at 4188,1702 h35 r90
  text "+2.5V" at 3588,1677 h35 r90
  text "RxADV" at 3883,1667 h35 r90
  text "RxRST" at 4088,1667 h35 r90
Bottom Overlay:
  text "IF1P" at 2642,3967 h35 r270
  text "IF1N" at 2847,3967 h35 r270
  text "IF2P" at 3047,3967 h35 r270
  text "IF2N" at 3242,3967 h35 r270
  text "GND" at 2742,3962 h35 r270
  text "GND" at 2942,3962 h35 r270
  text "GND" at 3147,3962 h35 r270
  text "GND" at 3342,3962 h35 r270
  text "GND" at 4082,3962 h35 r270
  text "GND" at 4182,3962 h35 r270
  text "+1.8V" at 4282,3962 h35 r270
  text "Vin" at 4382,3962 h35 r270
  text "Vin" at 4482,3962 h35 r270
  text "RFIN1*" at 1933,3418 h50 r270
  text "RFIN2*" at 1928,2983 h50 r270
  text "MIMO FMCW Radar Receiver" at 4610,2925 h100
  text "LOIN" at 4838,2898 h50 r270
  text "RFIN3" at 1928,2578 h50 r270
  text "RFIN4" at 1923,2153 h50 r270
  text "CS" at 4552,1792 h35 r270
  text "GND" at 2492,1762 h35 r270
  text "VIO" at 3652,1762 h35 r270
  text "DIR" at 3752,1762 h35 r270
  text "GND" at 2692,1757 h35 r270
  text "GND" at 2892,1757 h35 r270
  text "GND" at 3092,1757 h35 r270
  text "GND" at 3452,1757 h35 r270
  text "SDO" at 4247,1757 h35 r270
  text "SCK" at 4347,1757 h35 r270
  text "IF4P" at 2592,1732 h35 r270
  text "SDIO" at 4452,1732 h35 r270
  text "IF4N" at 2792,1727 h35 r270
  text "IF3P" at 2992,1727 h35 r270
  text "IF3N" at 3192,1727 h35 r270
  text "MADV" at 3952,1722 h35 r270
  text "MRST" at 4147,1722 h35 r270
  text "+2.5V" at 3547,1692 h35 r270
  text "RxADV" at 3847,1687 h35 r270
  text "RxRST" at 4047,1687 h35 r270
Mechanical 1:
  the board outline again, w10

## Text inside footprints (layer, text, board x,y; h text height)
J2: Top 3D Body "PCB EDGE" at 1643.2,3727.17 h32 r90
J3: Top 3D Body "PCB EDGE" at 1643.2,3297.17 h32 r90
J4: Top 3D Body "PCB EDGE" at 1643.2,2867.17 h32 r90
J5: Top 3D Body "PCB EDGE" at 1643.2,2437.17 h32 r90
J6: Top 3D Body "PCB EDGE" at 5174.59,2806.57 h32 r270